# Altium PCB 243-4xx-Suiveur-IR-7.PcbDoc
Units mm, origin at the board's own origin, x right, y up, seen from the top; angles counter-clockwise.
Board outline 88.27 x 31.11 mm, 2 copper layers (Top Layer, Bottom Layer), stack 1.569 mm thick; 61 components, 35 nets, 173 pads, 168 vias.
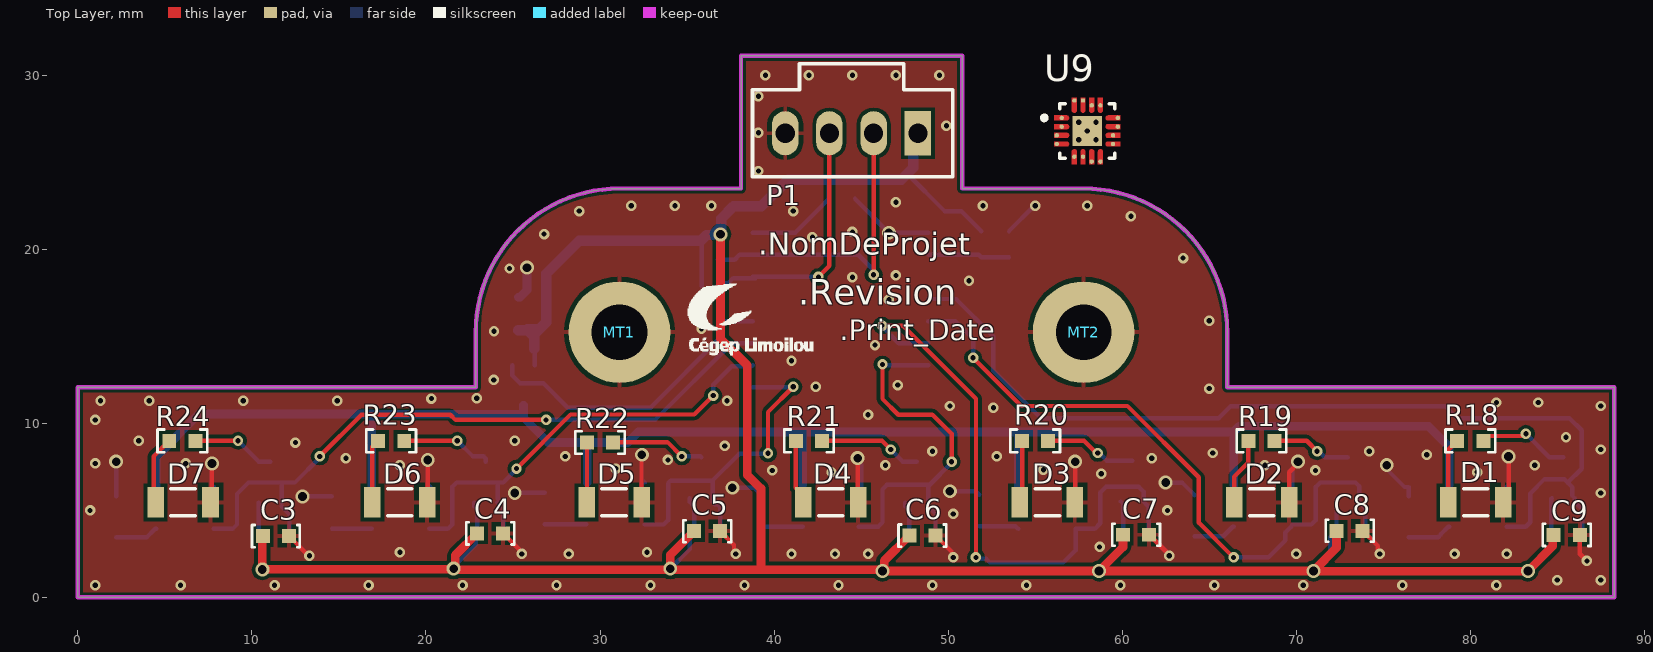
[diagram p0: Top Layer view]
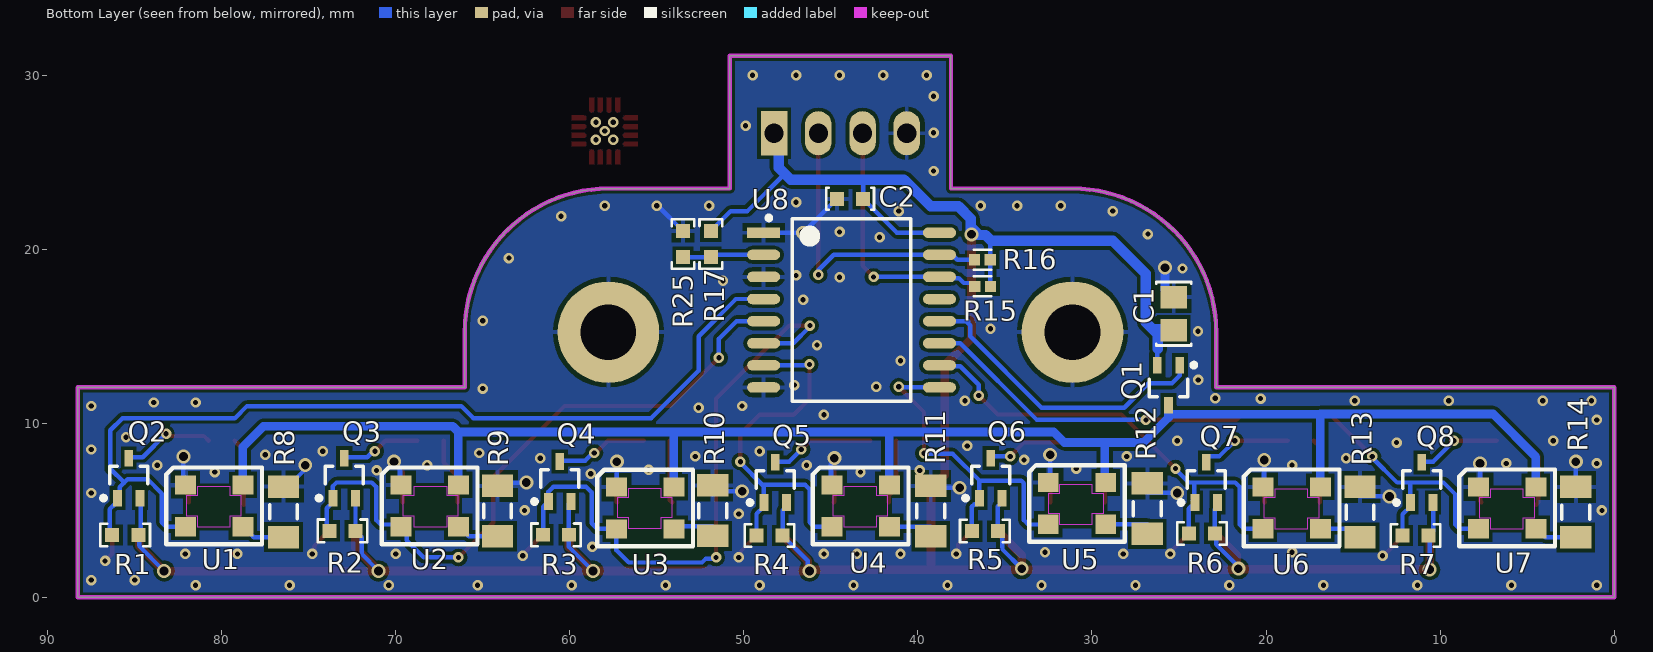
[diagram p1: Bottom Layer view, seen from below]
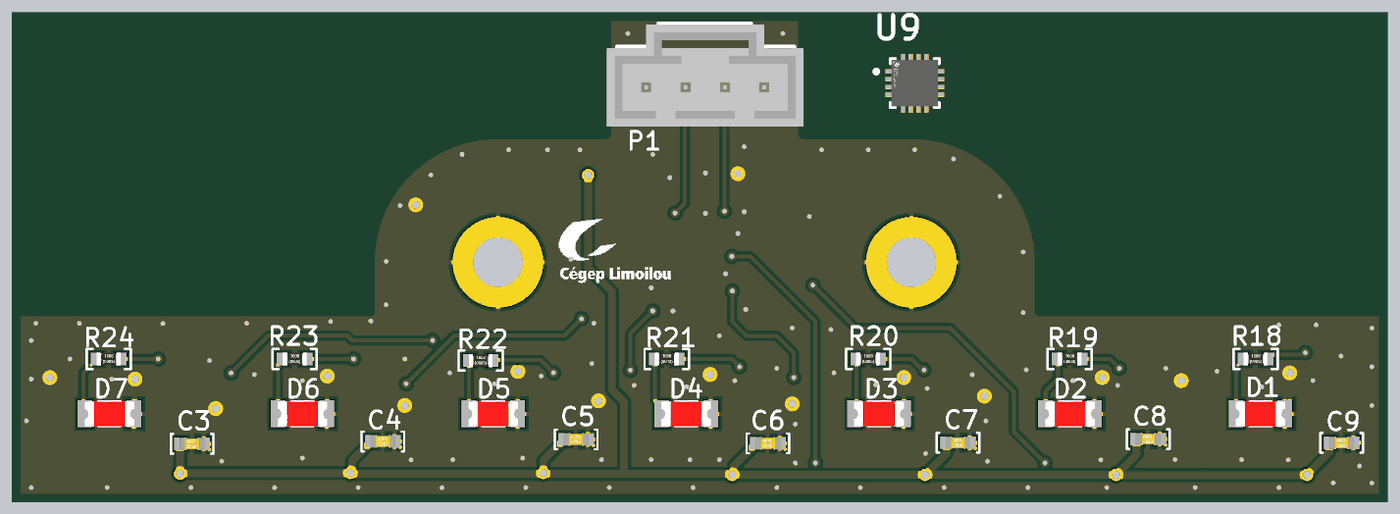
[diagram p2: 3D render of the assembled board from above, using the file's embedded part models]
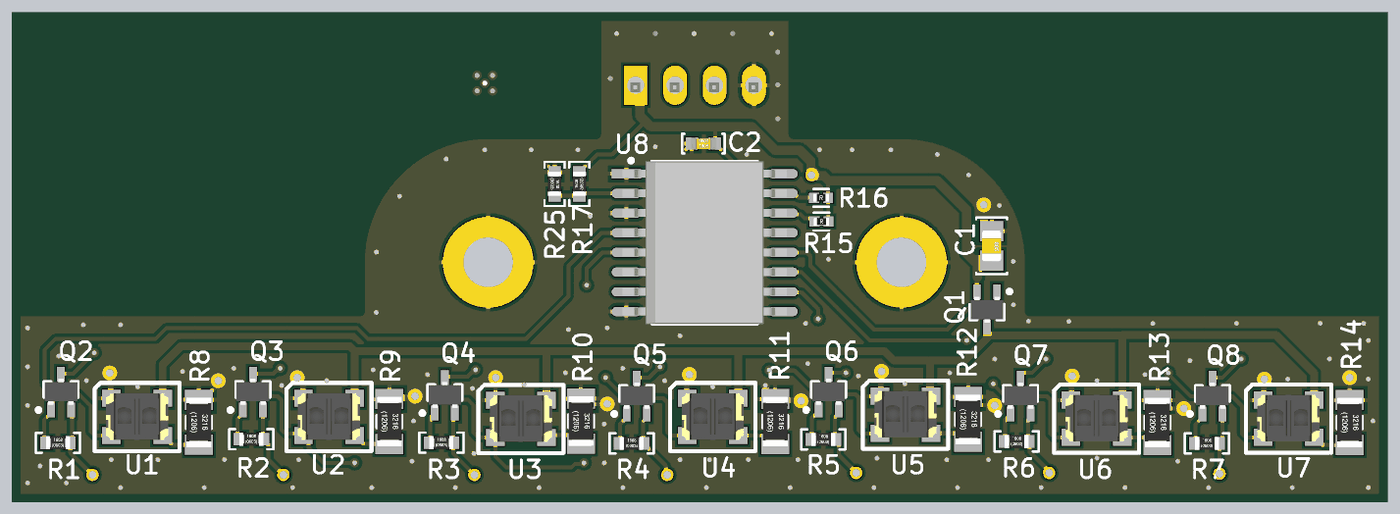
[diagram p3: 3D render of the assembled board from below, using the file's embedded part models]

## Layer stack, top to bottom
Top Solder: solder mask 0.0254, SM-001, Dk 4
Top Layer: signal copper 0.035
Dielectric 1: core 1.4986, Core-043, Dk 4.3
Bottom Layer: signal copper 0.035
Bottom Solder: solder mask 0.0254, SM-001, Dk 4

## Board outline
0,0 0,12.065 22.86,12.065 22.86,15.24 cw(c31.115,15.24) 31.115,23.495 38.1,23.495 38.1,31.115 50.8,31.115 50.8,23.495 57.785,23.495 cw(c57.785,15.24) 66.04,15.24 66.04,12.065 88.265,12.065 88.265,0

## Design rules (kind name [scope] priority, off if disabled: settings)
BoardOutlineClearance [All] p1: gap=0.3 ignorepadtopadclearanceinfootprint=FALSE
Clearance [All] p1: gap=0.2 ignorepadtopadclearanceinfootprint=FALSE
HoleSize [All] p1: absolutevalues=TRUE maxlimit=5 minlimit=0.3 maxpercent=80.000 minpercent=20.000
MinimumSolderMaskSliver [All] p1: minsoldermaskwidth=0.075
PolygonConnect [All] p1: thpad.connectstyle=Relief thpad.reliefconductorwidth=0.254 thpad.reliefentries=4 thpad.polygonreliefangle="90 Angle" thpad.airgapwidth=0.254 smdpad.connectstyle=Relief smdpad.reliefconductorwidth=0.254 smdpad.reliefentries=4 smdpad.polygonreliefangle="90 Angle" smdpad.airgapwidth=0.254 via.connectstyle=Direct via.reliefconductorwidth=0.254 via.reliefentries=4 via.polygonreliefangle="90 Angle" via.airgapwidth=0.254
RoutingVias [All] p1: holewidth=0.5 width=0.8 viastyle="Through Hole" minholewidth=0.3 minwidth=0.6 maxholewidth=0.711 maxwidth=1.27
SilkToSilkClearance [All] p1: silktosilkclearance=0
SilkToSolderMaskClearance [IsPad] p1: minsilkscreentomaskgap=0 clearancetoexposedcopper=TRUE
SolderMaskExpansion [All] p1: expansion=0.075 istentingtop=FALSE
SupplyNets "Schematic Supply Nets_1" [InNet('VCC')] p1: voltage=0.000
SupplyNets "Schematic Supply Nets" [InNet('GND')] p2: voltage=0.000
UnConnectedPin [All] p1:
Width [All] p1: maxlimit=5 minlimit=0.15 preferedwidth=0.2
26 further rules are at their usual default settings.

## Classes and differential pairs
component class SuiveurLigne7: MT1 MT2 P1 U9
component class "IO Expander": C2 R15 R16 R17 R25 U8
component class "Capteur IR": C1 Q1 R1 R2 R3 R4 R5 R6 R7 R8 R9 R10 R11 R12 R13 R14 U1 U2 U3 U4 U5 U6 U7
component class "Indicateurs DEL": C3 C4 C5 C6 C7 C8 C9 D1 D2 D3 D4 D5 D6 D7 Q2 Q3 Q4 Q5 Q6 Q7 Q8 R18 R19 R20 R21 R22 R23 R24

## Components (designator, comment, footprint, x,y, rotation, side; value= is the part's Value field where it differs from the comment)
C1 "CAP CER 4.7uF 25V X7R 0805" C_2012[0805] 25.3,16.3 r270 bottom value=4.7uF
C2 "CAP CER 100nF 50V 0603" C_1608[0603] 43.9,22.9 r180 bottom value=100nF
C3 "CAP CER 100nF 50V 0603" C_1608[0603] 11.38,3.526 r180 top value=100nF
C4 "CAP CER 100nF 50V 0603" C_1608[0603] 23.686,3.678 r180 top value=100nF
C5 "CAP CER 100nF 50V 0603" C_1608[0603] 36.155,3.81 r180 top value=100nF
C6 "CAP CER 100nF 50V 0603" C_1608[0603] 48.527,3.556 r180 top value=100nF
C7 "CAP CER 100nF 50V 0603" C_1608[0603] 60.8,3.6 r180 top value=100nF
C8 "CAP CER 100nF 50V 0603" C_1608[0603] 73.069,3.829 r180 top value=100nF
C9 "CAP CER 100nF 50V 0603" C_1608[0603] 85.544,3.59 r180 top value=100nF
D1 "XL-3216SURC-FB" "LED 1206" 80.315,5.461 r180 top
D2 "XL-3216SURC-FB" "LED 1206" 68.021,5.461 r180 top
D3 "XL-3216SURC-FB" "LED 1206" 55.702,5.461 r180 top
D4 "XL-3216SURC-FB" "LED 1206" 43.256,5.461 r180 top
D5 "XL-3216SURC-FB" "LED 1206" 30.81,5.461 r180 top
D6 "XL-3216SURC-FB" "LED 1206" 18.491,5.461 r180 top
D7 "XL-3216SURC-FB" "LED 1206" 6.045,5.461 r180 top
MT1 "" MTHOLE 31.115,15.24 r0 top locked
MT2 "" MTHOLE 57.785,15.24 r0 top locked
P1 "0705430108" MOLEX4 44.45,26.67 r180 top
Q1 "HXY2101EI" SOT-323 25.6,12.2 r270 bottom
Q2 "HXY2101EI" SOT-323 85.344,6.858 r90 bottom
Q3 "HXY2101EI" SOT-323 72.962,6.858 r90 bottom
Q4 "HXY2101EI" SOT-323 60.58,6.661 r90 bottom
Q5 "HXY2101EI" SOT-323 48.199,6.604 r90 bottom
Q6 "HXY2101EI" SOT-323 35.817,6.858 r90 bottom
Q7 "HXY2101EI" SOT-323 23.435,6.604 r90 bottom
Q8 "HXY2101EI" SOT-323 11.053,6.604 r90 bottom
R1 "Res 30k 1% 0603" R_1608[0603] 85.544,3.59 r180 bottom value=30k
R2 "Res 30k 1% 0603" R_1608[0603] 73.069,3.829 r180 bottom value=30k
R3 "Res 30k 1% 0603" R_1608[0603] 60.8,3.6 r180 bottom value=30k
R4 "Res 30k 1% 0603" R_1608[0603] 48.527,3.556 r180 bottom value=30k
R5 "Res 30k 1% 0603" R_1608[0603] 36.155,3.81 r180 bottom value=30k
R6 "Res 30k 1% 0603" R_1608[0603] 23.686,3.678 r180 bottom value=30k
R7 "Res 30k 1% 0603" R_1608[0603] 11.41,3.556 r180 bottom value=30k
R8 "Res 150R 5% 1206" R_3216[1206] 76.454,4.914 r270 bottom value=150R
R9 "Res 150R 5% 1206" R_3216[1206] 64.157,4.964 r270 bottom value=150R
R10 "Res 150R 5% 1206" R_3216[1206] 51.797,4.987 r270 bottom value=150R
R11 "Res 150R 5% 1206" R_3216[1206] 39.265,4.964 r270 bottom value=150R
R12 "Res 150R 5% 1206" R_3216[1206] 26.819,5.104 r270 bottom value=150R
R13 "Res 150R 5% 1206" R_3216[1206] 14.6,4.9 r270 bottom value=150R
R14 "Res 150R 5% 1206" R_3216[1206] 2.2,4.9 r270 bottom value=150R
R15 "Res 2k2 1% 0402" R_1005[0402] 36.28,17.87 r180 bottom value=2k2
R16 "Res 2k2 1% 0402" R_1005[0402] 36.3,19.4 r180 bottom value=2k2
R17 "Res 1k 1% 0603" R_1608[0603] 51.9,20.3 r90 bottom value=1k
R18 "Res 1k 1% 0603" R_1608[0603] 80,9 r0 top value=1k
R19 "Res 1k 1% 0603" R_1608[0603] 68,9 r0 top value=1k
R20 "Res 1k 1% 0603" R_1608[0603] 55,9 r0 top value=1k
R21 "Res 1k 1% 0603" R_1608[0603] 42,9 r0 top value=1k
R22 "Res 1k 1% 0603" R_1608[0603] 30,8.9 r0 top value=1k
R23 "Res 1k 1% 0603" R_1608[0603] 18,9 r0 top value=1k
R24 "Res 1k 1% 0603" R_1608[0603] 6,9 r0 top value=1k
R25 "Res 1k 1% 0603" R_1608[0603] 53.5,20.3 r270 bottom value=DNP
U1 "ITR1502SR40A/TR8" GP2S700HCP 80.438,5.264 r180 bottom
U2 "ITR1502SR40A/TR8" GP2S700HCP 68.056,5.264 r180 bottom
U3 "ITR1502SR40A/TR8" GP2S700HCP 55.673,5.137 r180 bottom
U4 "ITR1502SR40A/TR8" GP2S700HCP 43.293,5.264 r180 bottom
U5 "ITR1502SR40A/TR8" GP2S700HCP 30.86,5.404 r180 bottom
U6 "ITR1502SR40A/TR8" GP2S700HCP 18.529,5.15 r180 bottom
U7 "ITR1502SR40A/TR8" GP2S700HCP 6.147,5.15 r180 bottom
U8 "PCF8574T/TR" SOIC127P1030X265-16N 43.815,16.51 r180 bottom locked
U9 "TLA2528IRTER" FP-TLA2528IRTER-MFG 58,26.8 r0 top

## Footprints (in the part's own frame and the unit in brackets; to place one, negate y for a bottom-side part, rotate by r counter-clockwise, add the part's x,y. Pads: shape width x height; smd on the part's side, far side on the other; paste and mask are expansions set on the pad)
C_1608[0603] [mm] "Capacitor MLCC; Body 1.6 x 0.8 mm (LxW typ)"
  rect 0.8x0.8 smd: 1(-0.75,0) 2(0.75,0)
  silkscreen extent -1.37,-0.64 1.38,0.64, body extent -0.8,-0.4 0.8,0.4, height 0.8
C_2012[0805] [mm] "Capacitor MLCC; Body 2.0 x 1.3 mm (LxW typ)"
  rect 1.3x1.5 smd: 1(-0.95,0) 2(0.95,0)
  silkscreen extent -1.83,-1 1.83,1, body extent -1,-0.62 1,0.63, height 0.78
FP-TLA2528IRTER-MFG [mm]
  round 0.252 smd paste-1000 mask+0: 1(-1.475,0.75) 2(-1.475,0.25) 3(-1.76,-0.25) 4(-1.76,-0.75) 5(-0.75,-1.475) 6(-0.25,-1.475) 7(0.25,-1.76) 8(0.75,-1.76) 9(1.475,-0.75) 10(1.475,-0.25) 11(1.75,0.25) 12(1.75,0.75) 13(0.75,1.475) 14(0.25,1.475) 15(-0.25,1.75) 16(-0.75,1.75)
  rect 1.7x1.7 smd paste-1000 mask+0: 17(0,0)
  Top Layer region: -0.61,1.9 -0.61,1.19 -0.621,1.136 -0.651,1.091 -0.696,1.061 -0.75,1.05 -0.75,1.05 -0.804,1.061 -0.849,1.091 -0.879,1.136 -0.89,1.19 -0.89,1.19 -0.89,1.9
  Top Layer region: -0.11,1.9 -0.11,1.19 -0.121,1.136 -0.151,1.091 -0.196,1.061 -0.25,1.05 -0.25,1.05 -0.304,1.061 -0.349,1.091 -0.379,1.136 -0.39,1.19 -0.39,1.19 -0.39,1.9
  Top Layer region: 0.39,1.9 0.39,1.19 0.379,1.136 0.349,1.091 0.304,1.061 0.25,1.05 0.25,1.05 0.196,1.061 0.151,1.091 0.121,1.136 0.11,1.19 0.11,1.19 0.11,1.9
  Top Layer region: 0.89,1.9 0.89,1.19 0.879,1.136 0.849,1.091 0.804,1.061 0.75,1.05 0.75,1.05 0.696,1.061 0.651,1.091 0.621,1.136 0.61,1.19 0.61,1.19 0.61,1.9
  Top Layer region: 0.61,-1.9 0.61,-1.19 0.621,-1.136 0.651,-1.091 0.696,-1.061 0.75,-1.05 0.75,-1.05 0.804,-1.061 0.849,-1.091 0.879,-1.136 0.89,-1.19 0.89,-1.19 0.89,-1.9
  Top Layer region: 0.11,-1.9 0.11,-1.19 0.121,-1.136 0.151,-1.091 0.196,-1.061 0.25,-1.05 0.25,-1.05 0.304,-1.061 0.349,-1.091 0.379,-1.136 0.39,-1.19 0.39,-1.19 0.39,-1.9
  Top Layer region: -0.39,-1.9 -0.39,-1.19 -0.379,-1.136 -0.349,-1.091 -0.304,-1.061 -0.25,-1.05 -0.25,-1.05 -0.196,-1.061 -0.151,-1.091 -0.121,-1.136 -0.11,-1.19 -0.11,-1.19 -0.11,-1.9
  Top Layer region: -0.89,-1.9 -0.89,-1.19 -0.879,-1.136 -0.849,-1.091 -0.804,-1.061 -0.75,-1.05 -0.75,-1.05 -0.696,-1.061 -0.651,-1.091 -0.621,-1.136 -0.61,-1.19 -0.61,-1.19 -0.61,-1.9
  Top Layer region: 1.9,0.61 1.19,0.61 1.136,0.621 1.091,0.651 1.061,0.696 1.05,0.75 1.05,0.75 1.061,0.804 1.091,0.849 1.136,0.879 1.19,0.89 1.19,0.89 1.9,0.89
  Top Layer region: 1.9,0.11 1.19,0.11 1.136,0.121 1.091,0.151 1.061,0.196 1.05,0.25 1.05,0.25 1.061,0.304 1.091,0.349 1.136,0.379 1.19,0.39 1.19,0.39 1.9,0.39
  Top Layer region: 1.9,-0.39 1.19,-0.39 1.136,-0.379 1.091,-0.349 1.061,-0.304 1.05,-0.25 1.05,-0.25 1.061,-0.196 1.091,-0.151 1.136,-0.121 1.19,-0.11 1.19,-0.11 1.9,-0.11
  Top Layer region: 1.9,-0.89 1.19,-0.89 1.136,-0.879 1.091,-0.849 1.061,-0.804 1.05,-0.75 1.05,-0.75 1.061,-0.696 1.091,-0.651 1.136,-0.621 1.19,-0.61 1.19,-0.61 1.9,-0.61
  Top Layer region: -1.9,-0.61 -1.19,-0.61 -1.136,-0.621 -1.091,-0.651 -1.061,-0.696 -1.05,-0.75 -1.05,-0.75 -1.061,-0.804 -1.091,-0.849 -1.136,-0.879 -1.19,-0.89 -1.19,-0.89 -1.9,-0.89
  Top Layer region: -1.9,-0.11 -1.19,-0.11 -1.136,-0.121 -1.091,-0.151 -1.061,-0.196 -1.05,-0.25 -1.05,-0.25 -1.061,-0.304 -1.091,-0.349 -1.136,-0.379 -1.19,-0.39 -1.19,-0.39 -1.9,-0.39
  Top Layer region: -1.9,0.39 -1.19,0.39 -1.136,0.379 -1.091,0.349 -1.061,0.304 -1.05,0.25 -1.05,0.25 -1.061,0.196 -1.091,0.151 -1.136,0.121 -1.19,0.11 -1.19,0.11 -1.9,0.11
  Top Layer region: -1.9,0.89 -1.19,0.89 -1.136,0.879 -1.091,0.849 -1.061,0.804 -1.05,0.75 -1.05,0.75 -1.061,0.696 -1.091,0.651 -1.136,0.621 -1.19,0.61 -1.19,0.61 -1.9,0.61
  silkscreen extent -2.6,-1.58 1.58,1.58, body extent -2,-2 2,2, height 0.25
GP2S700HCP [mm]
  rect 1.2x1.1 smd: 1(-1.65,1.2) 2(-1.65,-1.2) 3(1.65,-1.2) 4(1.65,1.2)
  silkscreen extent -2.75,-2.2 2.75,2.2, body extent -2,-1.47 2,1.53, height 2
"LED 1206" [mm]
  rect 0.95x1.75 smd: 1(-1.575,0) 2(1.575,0)
  silkscreen extent -0.7,-0.78 0.7,0.78, body extent -1.6,-0.8 1.6,0.8, height 1.1
MOLEX4 [mm]
  rect 1.524x2.54 hole 1.1: 1(-3.81,0)
  oval 1.524x2.54 hole 1.1: 2(-1.27,0) 3(1.27,0) 4(3.81,0)
  silkscreen extent -5.81,-4 5.69,2.5, body extent -6.38,-3.93 6.32,2.68, height 11.81
MTHOLE [mil]
  round 230 / inner round 60 / far side round 230 hole 125.98: 1(0,0)
R_1005[0402] [mm] "Chip Resistor; Body 1.1 x 0.5 mm (LxW typ)"
  rect 0.65x0.65 smd mask+0.075: 1(-0.45,0) 2(0.45,0)
  silkscreen extent -0.5,-0.57 0.5,0.57, body extent -0.5,-0.25 0.5,0.26, height 0.36
R_1608[0603] [mm] "Chip Resistor; Body 1.6 x 0.8 mm (LxW typ)"
  rect 0.8x0.8 smd: 1(-0.75,0) 2(0.75,0)
  silkscreen extent -1.43,-0.65 1.43,0.65, body extent -0.77,-0.42 0.78,0.43, height 0.45
R_3216[1206] [mm] "Chip Resistor, Body 3.2x1.6mm, IPC Medium Density"
  rect 1.3x1.8 smd: 1(-1.45,0) 2(1.45,0)
  silkscreen extent -0.4,-0.8 0.4,0.8, body extent -1.6,-0.8 1.6,0.8, height 0.55
SOIC127P1030X265-16N [mm] "SOIC, 16-Leads, Body 10,30x7,50mm, Pitch 1,27mm, IPC Medium Density"
  rect 1.9x0.6 smd: 1(-5.05,4.445)
  oval 1.9x0.6 smd: 2(-5.05,3.175) 3(-5.05,1.905) 4(-5.05,0.635) 5(-5.05,-0.635) 6(-5.05,-1.905) 7(-5.05,-3.175) 8(-5.05,-4.445) 9(5.05,-4.445) 10(5.05,-3.175) 11(5.05,-1.905) 12(5.05,-0.635) 13(5.05,0.635) 14(5.05,1.905) 15(5.05,3.175) 16(5.05,4.445)
  silkscreen extent -4.88,-5.25 3.4,5.42, body extent -5.32,-5.25 5.32,5.25, height 2.62
SOT-323 [mm] "SOT23, 3-Leads, Body 2,00x2,28mm, Pitch 0,65mm, IPC Medium Density"
  rect 0.95x0.5 smd: 1(-1.15,0.65) 2(-1.15,-0.65) 3(1.15,0)
  silkscreen extent -1.27,-1.1 0.67,1.57, body extent -1.02,-1.05 1.08,1.05, height 0.9

## Part data
C1: library part CAP003, "Capacitor type 1", Dielectric=X7R, Manufacturer 1="Taiyo Yuden", Manufacturer Part Number 1=TMK212AB7475KG-T, Rated Voltage=25V, Supplier Part Number 1=C163186, Tolerance=10%, Code CEGEP=KCOND02SM, LibRef=CAP003, Mounting Technology=SMT, Supplier 1=LCSC
C2 C3 C4 C5 C6 C7 C8 C9: library part CAP002, "Capacitor type 1", Dielectric=X7R, Manufacturer 1=Yageo, Manufacturer Part Number 1=CC0603KRX7R9BB104, Rated Voltage=50V, Supplier Part Number 1=C14663, Tolerance=10%, Code CEGEP=COND0143SM, LibRef=CAP002, Mounting Technology=SMT, Supplier 1=LCSC
D1 D2 D3 D4 D5 D6 D7: library part D_LED_RED_1206, "DEL Rouge 1206", Manufacturer 1=XINGLIGHT, Manufacturer 2="Würth Elektronik", Manufacturer Part Number 2=150120RS75000, Supplier Part Number 1=C3646938, Code CEGEP=LEDROUGECLAIR, Localisation=AVP-14, Manufacturer Part Number 1=XL-3216SURC-FB, Mounting Technology=SMT, Supplier 1=LCSC, Supplier 2=Digikey, Supplier Part Number 2=732-4991-1-ND
MT1 MT2: library part ANTENNA
P1: library part CONN-100MIL-HDR-01X04-WIRE-TO-BORAD, "CONN HEADER VERT 4POS 2.54MM", Manufacturer 1=CJT, Manufacturer 2=Molex, Manufacturer Part Number 1=A2547WV-4P, Supplier Part Number 1=C5224497, Code CEGEP=CONDIV089, Localisation=AV-Q06--R14-J057, Manufacturer Part Number 2=0705430108, Mounting Technology=TH, Supplier 1=LCSC, Supplier 2=Digikey, Supplier Part Number 2=WM4124-ND
Q1 Q2 Q3 Q4 Q5 Q6 Q7 Q8: library part Q_PMOS-20V-1.8A, "MOSFET P-CH 20V 1.8A SOT-323", Manufacturer 1="HXY Mosfet", Manufacturer 2=MCC, Manufacturer Part Number 2=SI2101A-TP, Supplier Part Number 1=C5148643, Manufacturer Part Number 1=HXY2101EI, Mounting Technology=SMT, Supplier 1=LCSC, Supplier 2=Digikey, Supplier Part Number 2=353-SI2101A-TPCT-ND
R1 R2 R3 R4 R5 R6 R7: library part RES030, "Resistor type 1", Manufacturer 1=Yageo, Manufacturer Part Number 1=RC0603FR-0730KL, Max Working Voltage=75V, Supplier Part Number 1=C100001, Tolerance=1%, LibRef=RES030, Mounting Technology=SMT, Puissance=1/10W, Supplier 1=LCSC
R8 R9 R10 R11 R12 R13 R14: library part RES042, "Resistor type 1", Max Working Voltage=200V, Tolerance=5%, Code CEGEP=RESI0045SMT, LibRef=RES042, Localisation=AV-P24--R14-J04, Mounting Technology=SMT, Puissance=1/4W
R15 R16: library part RES008, "Resistor type 1", Manufacturer 1=Yageo, Manufacturer Part Number 1=RC0402FR-072K2L, Max Working Voltage=50V, Supplier Part Number 1=C114762, Tolerance=1%, Code CEGEP=RES2.2KSM, LibRef=RES008, Mounting Technology=SMT, Puissance=1/16W, Supplier 1=LCSC, Supplier 2=Digi-Key, Supplier Part Number 2=311-2.20KLRCT-ND
R17 R18 R19 R20 R21 R22 R23 R24 R25: library part RES015, "Resistor type 1", Manufacturer 1=Yageo, Manufacturer Part Number 1=RC0603FR-071KL, Max Working Voltage=75V, Supplier Part Number 1=C22548, Tolerance=1%, LibRef=RES015, Mounting Technology=SMT, Puissance=1/10W, Supplier 1=LCSC
U1 U2 U3 U4 U5 U6 U7: library part U_ITR1502SR40A/TR8, "PHOTOINTERRUPTER REFLECTIVE 3MM SMD", Manufacturer 1=Everlight, Manufacturer 2=Sharp, Manufacturer Part Number 2=GP2S700HCP, Supplier Part Number 1=C183793, Manufacturer Part Number 1=ITR1502SR40A/TR8, Mounting Technology=SMT, Supplier 1=LCSC, Supplier 2=Digikey, Supplier Part Number 2=1855-1020-1-ND
U8: library part U_PCF8574-SOIC, "Remote 8-bit I/O expander for I2C-bus", Manufacturer 1="HG Semi", Manufacturer 2=TI, Manufacturer Part Number 2=PCF8574DWR, Supplier Part Number 1=C2987288, Code CEGEP=KIC8574SM, Localisation=R13-D030, Manufacturer Part Number 1=PCF8574T/TR, Mounting Technology=SMT, Supplier 1=LCSC, Supplier 2=Digikey, Supplier Part Number 2=296-13108-1-ND
U9: library part CMP-04860-000031-1, "SMALL 8-CHANNEL 12-BIT ANALOG-TO", RoHS Compliant=Yes

## Via types
v1: diameter 0.6, hole 0.3, Top Layer to Bottom Layer, tented both sides, 139 vias
v2: diameter 0.8, hole 0.5, Top Layer to Bottom Layer, 24 vias
v3: diameter 0.6, hole 0.3, Top Layer to Bottom Layer, 5 vias

## Nets (pads, with @x,y where several pads share a name; then routed paths per layer and width w, separated by ;. In a path a pad name is that pad's centre, name@x,y a point inside that pad or via, vN(x,y) a via of type N, cw(c..) or ccw(c..) an arc to the next point about the centre after c; other vN are vias at no path point)
GND: C1.1 C2.1 C3.1 C4.1 C5.1 C6.1 C7.1 C8.1 C9.1 D1.1 D2.1 D3.1 D4.1 D5.1 D6.1 D7.1 MT1.1 MT2.1 P1.4 R8.1 R9.1 R10.1 R11.1 R12.1 R13.1 R14.1 R25.1 U1.1 U2.1 U3.1 U4.1 U5.1 U6.1 U7.1 U8.1 U8.3 U8.8 | length 63.1
  Top Layer w0.254: D7.1 7.7,5.541 v2(7.7,7.7) ; C3.1 13.256,2.4 v1(13.3,2.4) ; D6.1 20.1,5.495 v2(20.1,7.9) ; C4.1 25.434,2.68 25.434,2.566 v1(25.5,2.5) ; D5.1 32.385,8.185 v2(32.4,8.2) ; C5.1 37.696,3.019 37.696,2.604 v1(37.8,2.5) ; v2(44.8,8) 44.8,5.492 D4.1 ; C6.1 50.196,2.637 50.196,2.404 v1(50.3,2.3) ; D3.1 57.3,5.484 v2(57.3,7.8) ; C7.1 62.7,2.45 v1(62.7,2.4) ; D2.1 69.596,7.2 70.1,7.703 v2(70.1,7.8) ; C8.1 74.696,2.952 74.696,2.604 v1(74.8,2.5) ; D1.1 81.89,5.861 82.2,6.171 v2(82.2,8.1) ; C9.1 86.294,2.506 v1(86.7,2.1)
  Bottom Layer w0.254: R14.1@2.194,5.806 2.2,5.813 v2(2.2,7.8) ; v2(7.7,7.7) 7.7,6.447 U7.1 ; v2(12.9,5.8) 12.906,5.806 R13.1@14.594,5.806 ; v2(20.1,7.9) 20.1,6.493 U6.1@20.243,6.35 ; v2(25.1,6) 25.11,6.01 R12.1@26.812,6.01 ; v2(32.4,8.2) 32.4,6.766 U5.1@32.562,6.604 ; v2(37.6,6.3) 38.849,6.3 39.258,5.891 R11.1@39.258,5.87 ; C2.1 v2(46.595,20.955) U8.1 ; v2(44.8,8) 44.8,7.852 45.008,7.644 U4.1@45.008,6.35 ; v2(50.1,6.1) 51.584,6.1 R10.1@51.791,5.893 ; R25.1 54.95,22.5 v1(55,22.5) ; U3.1@57.3,6.377 v2(57.3,7.8) ; v2(62.5,6.6) 63.441,6.6 64.15,5.891 R9.1@64.15,5.87 ; U2.1@69.773,6.337 69.773,7.395 70.1,7.722 v2(70.1,7.8) ; v2(75.2,7.6) 75.304,7.496 75.304,7.264 76.222,6.346 76.454,6.346 R8.1@76.454,5.814 ; U1.1@82.092,6.35 82.2,6.458 v2(82.2,8.1)
  Bottom Layer w0.5: C1.1 25.4,17.25 25.8,17.65 25.8,18.941 v2(25.807,18.948)
  other v1: 1,0.7 5.9,0.7 11.3,0.7 16.7,0.7 22.1,0.7 27.5,0.7 32.9,0.7 38.3,0.7 43.7,0.7 49.1,0.7 54.5,0.7 59.9,0.7 65.3,0.7 70.4,0.7 76.1,0.7 81.5,0.7 85,1 87.5,1 28.2,2.5 41,2.5 43.5,2.5 45.4,2.5 70,2.5 79.1,2.5 82.1,2.5 18.5,2.6 32.7,2.6 58.7,2.9 50.3,4.8 0.7,5 62.6,5 87.5,6 58.8,7.1 43.3,7.2 80.4,7.2 39.9,7.3 71.1,7.3 55.473,7.337 30.9,7.4 18.5,7.6 46.4,7.6 68.2,7.6 83.7,7.6 1,7.7 6.2,7.7 33.9,7.9 15.4,8 61.7,8 28,8.1 52.8,8.1 77.5,8.2 65.2,8.3 49.1,8.4 74.2,8.4 87.5,8.5 37.167,8.708 12.5,8.9 3.5,9 25.1,9 85.5,9.2 1,10.2 45.4,10.5 52.6,10.9 50.1,11 87.5,11 81.5,11.2 83.9,11.2 1.3,11.3 4.1,11.3 9.5,11.3 14.9,11.3 37.3,11.3 20.312,11.425 22.921,11.445 65,12 42.4,12.1 47.1,12.2 23.9,12.5 41,13.6 45.8,14.5 23.907,15.299 35.829,15.439 65,15.9 46.6,17.1 51.2,18.2 44.5,18.4 47,18.5 24.8,18.9 63.5,19.5 42.2,20.7 26.784,20.875 44.5,21 60.5,21.9 28.8,22.2 41.1,22.2 31.8,22.5 34.3,22.5 36.4,22.5 52,22.5 58,22.5 47,22.7 39.1,24.5 39.1,26.7 49.9,27.1 39.1,28.8 39.5,30 42,30 44.5,30 47,30 49.5,30
NetD1_2: D1.2 R18.1 | length 3.9
  Top Layer w0.254: D1.2@78.74,5.334 D1.2 78.74,8.49 R18.1
NetD2_2: D2.2 R19.1 | length 3.9
  Top Layer w0.254: D2.2 66.446,6.946 67.25,7.75 R19.1
NetD3_2: D3.2 R20.1 | length 3.6
  Top Layer w0.254: D3.2 54.25,5.584 R20.1
NetD4_2: D4.2 R21.1 | length 3.7
  Top Layer w0.254: R21.1 41.25,6.292 41.681,5.861 D4.2
NetD5_2: D5.2 R22.1 | length 3.4
  Top Layer w0.254: D5.2@29.25,5.476 R22.1
NetD6_2: D6.2 R23.1 | length 3.7
  Top Layer w0.254: D6.2 16.916,8.666 R23.1
NetD7_2: D7.2 R24.1 | length 4.1
  Top Layer w0.254: D7.2@4.47,5.334 4.35,5.454 4.35,8.1 R24.1
NetQ1_1: Q1.1 U8.12 | length 17.7
  Bottom Layer w0.254: Q1.1 24.95,12.75 25.4,12.3 26.748,12.3 28.148,10.9 32.9,10.9 37,15 37,15.634 37.241,15.875 ; 37.113,15.875 37.241,15.875 ; U8.12 37.241,15.875
NetQ1_3: Q1.3 U1.4 U2.4 U3.4 U4.4 U5.4 U6.4 U7.4 | length 97.2
  Bottom Layer w0.5: U7.4 4.497,8.089 6.949,10.541 16.891,10.541 16.879,10.529 ; U6.4 16.879,10.529 ; Q1.3 25.6,10.541 25.6,10.341 ; U5.4@29.261,6.604 29.261,8.9 ; U4.4@41.642,6.477 41.642,9.5 ; U3.4@54.024,6.35 54.024,9.5 ; U2.4 66.406,9.5 ; U1.4 78.788,8.638 77.599,9.827 66.719,9.827 66.406,9.514 66.406,9.5 ; 16.879,10.529 25.412,10.529 25.6,10.341 ; 25.6,10.341 27.041,8.9 29.261,8.9 ; 29.261,8.9 31.6,8.9 32.2,9.5 41.642,9.5 ; 41.642,9.5 54.024,9.5 ; 54.024,9.5 66.406,9.5
NetQ2_1: Q2.1 R1.1 U1.2 U8.4 | length 54.8
  Bottom Layer w0.254: U8.4 50.455,17.145 52.6,15 52.6,13.034 55.334,10.3 65.538,10.3 66.233,10.995 78.547,10.995 79.242,10.3 85.7,10.3 86.4,9.6 86.4,7.4 85.6,6.6 ; U1.2 83.185,4.064 83.439,4.318 83.439,5.969 84.27,6.8 85.4,6.8 85.6,6.6 ; R1.1@86.444,3.59 86.444,5.061 86.145,5.36 86.117,5.36 85.994,5.483 Q2.1 85.871,5.831 85.871,6.329 85.6,6.6
NetQ2_3: Q2.3 R18.2 | length 5.3
  Top Layer w0.254: R18.2 81.023,9.273 82.979,9.273 83.106,9.4 v1(83.2,9.4)
  Bottom Layer w0.254: v1(83.2,9.4) 84.542,8.058 Q2.3@85.344,8.058
NetQ3_1: Q3.1 R2.1 U2.2 U8.5 | length 38.4
  Top Layer w0.254: v1(51.434,13.766) 54.2,11 60.3,11 64.4,6.9 64.4,4.3 v1(66.4,2.3)
  Bottom Layer w0.254: U8.5 50.425,15.875 51.434,14.866 v1(51.434,13.766) ; v1(66.4,2.3) 68.4,2.3 69.382,3.282 69.382,3.74 U2.2 ; U2.2@69.769,4.191 70.866,4.191 71.12,4.445 71.12,6.35 71.374,6.604 73.406,6.604 73.612,6.398 73.612,5.483 73.969,5.126 R2.1@73.969,3.829
NetQ3_3: Q3.3 R19.2 | length 4.6
  Top Layer w0.254: R19.2 70.6,9 v1(71.2,8.4)
  Bottom Layer w0.254: v1(71.2,8.4) 71.294,8.4 71.636,8.058 Q3.3@72.962,8.058
NetQ4_1: Q4.1 R3.1 U3.2 U8.6 | length 35.5
  Top Layer w0.254: v1(46.203,15.621) 47.396,15.621 51.6,11.417 v1(51.6,2.3)
  Bottom Layer w0.254: v1(46.203,15.621) 46.203,15.57 47.168,14.605 U8.6 ; v1(51.6,2.3) 51.666,2.234 52.181,2.234 52.408,2.007 56.617,2.007 57.323,2.713 U3.2 58.42,3.937 58.74,4.257 58.74,6.035 59.072,6.367 60.943,6.367 61.23,6.08 Q4.1 61.53,5.211 61.53,3.675 R3.1@61.649,3.556
NetQ4_3: Q4.3 R20.2 | length 5.3
  Top Layer w0.254: R20.2 57.806,9 58.506,8.3 v1(58.6,8.3)
  Bottom Layer w0.254: v1(58.6,8.3) 58.685,8.3 59.124,7.861 Q4.3@60.58,7.861
NetQ5_1: Q5.1 R4.1 U4.2 U8.7 | length 22.2
  Top Layer w0.254: v1(46.228,13.386) 46.228,11.405 47.133,10.5 49.1,10.5 50.2,9.4 v1(50.2,7.8)
  Bottom Layer w0.254: U4.2@44.877,4.064 45.974,4.064 46.228,4.318 46.228,6.223 46.482,6.477 48.849,6.477 48.946,6.477 ; v1(46.228,13.386) 46.279,13.335 U8.7 ; R4.1 49.277,4.801 48.849,5.229 48.849,6.38 48.946,6.477 ; v1(50.2,7.8) 50.2,7.731 48.946,6.477
NetQ5_3: Q5.3 R21.2 | length 5.9
  Top Layer w0.254: R21.2 46.2,9 v1(46.7,8.5)
  Bottom Layer w0.254: v1(46.7,8.5) 47.396,7.804 Q5.3@48.199,7.804
NetQ6_1: Q6.1 R5.1 U5.2 U8.9 | length 20
  Top Layer w0.254: v1(39.649,8.28) 39.649,10.649 v1(41.1,12.1)
  Bottom Layer w0.254: U5.2@32.558,4.191 33.655,4.191 33.909,4.445 33.909,6.564 34.058,6.713 36.467,6.713 ; R5.1 36.905,5.211 36.756,5.36 36.59,5.36 36.467,5.483 Q6.1 36.467,6.713 ; U8.9 38.783,12.083 41.082,12.083 v1(41.1,12.1) ; v1(39.649,8.28) 39.624,8.255 38.009,8.255 36.467,6.713
NetQ6_3: Q6.3 R22.2 | length 5.4
  Top Layer w0.254: R22.2 30.777,8.927 33.873,8.927 v1(34.7,8.1)
  Bottom Layer w0.254: v1(34.7,8.1) 35.775,8.1 Q6.3@35.817,8.058
NetQ7_1: Q7.1 R6.1 U6.2 U8.10 | length 27.1
  Top Layer w0.254: v1(25.2,7.4) 28.31,10.51 35.41,10.51 v1(36.5,11.6)
  Bottom Layer w0.254: U6.2 21.247,3.95 21.26,3.937 21.514,4.191 21.514,6.35 21.768,6.604 24.13,6.604 ; Q7.1 24.436,5.103 R6.1 ; Q7.1@24.21,5.579 24.13,5.659 24.13,6.604 ; v1(25.2,7.4) 25.2,7.369 24.435,6.604 24.13,6.604 ; v1(36.5,11.6) 36.5,12.226 37.565,13.29 38.721,13.29 U8.10
NetQ7_3: Q7.3 R23.2 | length 5.3
  Top Layer w0.254: R23.2 v1(21.8,9)
  Bottom Layer w0.254: v1(21.8,9) 22.698,8.102 23.312,8.102 23.435,7.979 Q7.3@23.435,7.804
NetQ8_1: Q8.1 R7.1 U7.2 U8.11 | length 39.7
  Top Layer w0.254: v1(13.9,8.1) 13.9,8.109 16.294,10.503 21.399,10.503 21.702,10.2 v1(26.9,10.2)
  Bottom Layer w0.254: U7.2@7.793,3.937 8.89,3.937 9.144,4.191 9.144,5.944 9.804,6.604 11.703,6.604 ; Q8.1@11.703,5.229 12.16,4.772 R7.1 ; Q8.1 11.703,6.604 ; v1(13.9,8.1) 13.9,8.033 12.471,6.604 11.703,6.604 ; v1(26.9,10.2) 33.162,10.2 37.567,14.605 U8.11
NetQ8_3: Q8.3 R24.2 | length 4.8
  Top Layer w0.254: R24.2 v1(9.2,9)
  Bottom Layer w0.254: v1(9.2,9) 10.396,7.804 Q8.3@11.053,7.804
NetR8_2: R8.2 U1.3 | length 2.6
  Bottom Layer w0.254: R8.2 78.166,3.464 78.315,3.613 78.315,3.641 78.738,4.064 U1.3
NetR9_2: R9.2 U2.3 | length 2.5
  Bottom Layer w0.254: R9.2 65.806,3.514 66.356,4.064 U2.3
NetR10_2: R10.2 U3.3 | length 2.3
  Bottom Layer w0.254: R10.2@51.797,4.087 53.873,4.087 U3.3
NetR11_2: R11.2 U4.3 | length 7.2
  Bottom Layer w0.254: U4.3@41.649,4.07 U4.3 ; R11.2@39.265,4.064 U4.3 ; R11.2@39.265,4.064 U4.3 ; R11.2@39.265,4.064 U4.3 ; U4.3 U4.3@41.656,4.077 ; U4.3 U4.3@41.656,4.077 ; U4.3 U4.3@41.656,4.077
NetR12_2: R12.2 U5.3 | length 2.4
  Bottom Layer w0.254: R12.2@26.819,4.204 U5.3
NetR13_2: R13.2 U6.3 | length 2.3
  Bottom Layer w0.254: R13.2@14.6,3.95 U6.3 U6.3@16.891,3.95
NetR14_2: R14.2 U7.3 | length 2.5
  Bottom Layer w0.254: R14.2 3.947,3.45 4.447,3.95 U7.3
NetR17_1: R17.1 R25.2 U8.2 | length 4.7
  Bottom Layer w0.254: U8.2 51.765,19.685 R17.1 R25.2
SCL: P1.3 R15.1 U8.14 | length 14.8
  Top Layer w0.254: v1(42.545,18.415) 43.18,19.05 P1.3
  Bottom Layer w0.25: R15.1 36.93,18.07 37.37,18.07 37.648,18.348 38.933,18.348 U8.14@39,18.415
  Bottom Layer w0.254: U8.14 39,18.415 v1(42.545,18.415)
SDA: P1.2 R16.1 U8.15 | length 17.8
  Top Layer w0.254: v1(45.72,18.542) P1.2
  Bottom Layer w0.25: R16.1 37.735,19.4 38.02,19.685 U8.15
  Bottom Layer w0.254: U8.15 44.831,19.685 45.72,18.796 v1(45.72,18.542)
VCC: C1.2 C2.2 C3.2 C4.2 C5.2 C6.2 C7.2 C8.2 C9.2 P1.1 Q1.2 Q2.2 Q3.2 Q4.2 Q5.2 Q6.2 Q7.2 Q8.2 R1.2 R2.2 R3.2 R4.2 R5.2 R6.2 R7.2 R15.2 R16.2 R17.2 U8.16 | length 191.7
  Top Layer w0.5: C3.2 10.6,3.496 v2(10.6,1.6) 10.626,1.626 21.565,1.626 v2(21.59,1.651) ; C4.2 21.69,2.432 21.69,1.751 v2(21.59,1.651) ; v2(34.036,1.651) 34.036,2.441 C5.2 ; v2(36.926,20.863) 36.926,14.874 38.466,13.334 38.466,7.034 39.243,6.257 39.243,1.587 ; v2(46.228,1.524) v2@46.26,1.556 ; C6.2 46.332,2.111 46.332,1.628 v2@46.26,1.556 ; C7.2 60.05,2.9 v2(58.674,1.524) ; v2(70.993,1.524) v2(58.674,1.524) ; v2@71.016,1.501 83.289,1.501 v2(83.312,1.524) 84.746,2.958 84.746,3.542 C9.2 ; v2@71.056,1.587 72.319,2.85 C8.2 ; v2(21.59,1.651) 21.653,1.587 39.243,1.587 ; 39.243,1.587 46.228,1.587 v2@46.26,1.556 ; v2@46.26,1.556 46.291,1.524 v2(58.674,1.524)
  Bottom Layer w0.25: 35.8,20.5 35.85,20.45 R16.2 35.84,19.39 35.84,17.88 R15.2
  Bottom Layer w0.254: Q8.2 10.403,3.813 R7.2 10.6,3.496 v2(10.6,1.6) ; v2@21.463,1.651 22.858,3.046 22.858,3.6 R6.2 22.936,5.078 22.785,5.229 Q7.2 ; Q1.2 26.25,14.25 ; v2(34.036,1.651) 35.167,2.782 R5.2@35.167,3.81 ; Q6.2 35.167,5.483 35.405,5.245 R5.2 ; U8.16 41.205,20.955 C2.2 43.15,23.97 43.18,24 ; v2(46.228,1.524) 46.324,1.62 46.324,2.103 R4.2 47.777,5.001 47.549,5.229 Q5.2 ; 47.649,24.349 49.798,22.2 50.75,22.2 R17.2 ; v2(58.674,1.524) 60.05,2.9 R3.2 60.05,5.391 Q4.2 ; v2(70.993,1.524) 71.959,2.49 71.959,3.469 R2.2@72.244,3.754 ; R2.2@72.169,3.829 72.312,3.972 Q3.2 ; v2(83.312,1.524) 84.746,2.958 84.746,3.542 R1.2 R1.2@84.694,3.69 ; R1.2@84.644,3.59 84.644,5.658 Q2.2
  Bottom Layer w0.6: C1.2 25.85,15.35 26.211,14.989 ; C1.2@25.85,15.4 26.5,15.4 ; 26.211,14.289 26.211,14.989 ; 36.964,21.333 36.964,21.283 ; P1.1 47.998,26.408 47.998,24.698 47.649,24.349 47.3,24 43.18,24 40.8,24 39.268,22.468 37.668,22.468 36.964,21.764 36.964,21.283 ; 26.211,14.989 26.211,15.111 26.5,15.4 ; 26.5,15.4 26.9,15.8 26.9,18.6 28.8,20.5 35.8,20.5 36.125,20.825 36.506,20.825 ; 36.506,20.825 36.887,20.825 v2(36.926,20.863) 36.964,20.902 36.964,21.283 ; 36.506,20.825 36.964,21.283
pads on no net: U8.13 U9.1 U9.2 U9.3 U9.4 U9.5 U9.6 U9.7 U9.8 U9.9 U9.10 U9.11 U9.12 U9.13 U9.14 U9.15 U9.16 U9.17
copper on no net:
  other v3: 57.5,26.3 58.5,26.3 58,26.8 57.5,27.3 58.5,27.3

## Polygon pours and split planes (outlines as drawn)
GND on Top Layer "PLANE-TOP" (solid, remove dead copper, pour order 4): 0,0 0,12.065 22.86,12.065 22.86,15.24 cw(c31.115,15.24) 31.115,23.495 38.1,23.495 38.1,31.115 50.8,31.115 50.8,23.495 57.785,23.495 cw(c57.785,15.24) 66.04,15.24 66.04,12.065 88.265,12.065 88.265,0
GND on Bottom Layer "PLANE-BOT" (solid, remove dead copper, pour order 5): -0.084,-0.084 -0.084,11.981 22.776,11.981 22.776,15.156 cw(c31.031,15.156) 31.031,23.411 38.016,23.411 38.016,31.031 50.716,31.031 50.716,23.411 57.701,23.411 cw(c57.701,15.156) 65.956,15.156 65.956,11.981 88.181,11.981 88.181,-0.084

## Keep-outs
Bottom Layer:
  region: 78.867,5.842 79.502,5.842 79.502,6.35 81.407,6.35 81.407,5.842 82.042,5.842 82.042,4.699 81.407,4.699 81.407,4.064 79.502,4.064 79.502,4.699 78.867,4.699
  region: 66.421,5.842 67.056,5.842 67.056,6.35 68.961,6.35 68.961,5.842 69.596,5.842 69.596,4.699 68.961,4.699 68.961,4.064 67.056,4.064 67.056,4.699 66.421,4.699
  region: 54.102,5.74 54.737,5.74 54.737,6.248 56.642,6.248 56.642,5.74 57.277,5.74 57.277,4.597 56.642,4.597 56.642,3.962 54.737,3.962 54.737,4.597 54.102,4.597
  region: 41.719,5.842 42.355,5.842 42.355,6.35 44.259,6.35 44.259,5.842 44.895,5.842 44.895,4.699 44.259,4.699 44.259,4.064 42.355,4.064 42.355,4.699 41.719,4.699
  region: 29.337,5.969 29.972,5.969 29.972,6.477 31.877,6.477 31.877,5.969 32.512,5.969 32.512,4.826 31.877,4.826 31.877,4.191 29.972,4.191 29.972,4.826 29.337,4.826
  region: 16.954,5.715 17.59,5.715 17.59,6.223 19.494,6.223 19.494,5.715 20.13,5.715 20.13,4.572 19.494,4.572 19.494,3.937 17.59,3.937 17.59,4.572 16.954,4.572
  region: 4.572,5.715 5.207,5.715 5.207,6.223 7.112,6.223 7.112,5.715 7.747,5.715 7.747,4.572 7.112,4.572 7.112,3.937 5.207,3.937 5.207,4.572 4.572,4.572
Keep-Out Layer:
  lines w0.254: 0,0 88.265,0 88.265,12.065 66.04,12.065 66.04,15.24 ccw(c57.785,15.24) 57.785,23.495 50.8,23.495 50.8,31.115 38.1,31.115 38.1,23.495 31.115,23.495 ccw(c31.115,15.24) 22.86,15.24 22.86,12.065 22.225,12.065 0,12.065 0,0

## Silkscreen, mask and mechanical layers (free items; w line width, h text height)
Top Overlay:
  drawing of 18 lines, arcs and shapes, not listed
  text ".NomDeProjet" at 39.1,19.268 h2.2
  text ".Revision" at 41.4,16.325 h2.5
  text ".Print_Date" at 43.763,14.373 h2
Board:
  the board outline again, w0.5
Drill Drawing:
  lines w0.254: 98.503,5.89 99.837,5.89 99.837,7.224 98.503,7.224 98.503,5.89 ; 98.503,10.224 99.837,10.224 99.17,8.89 98.503,10.224 ; 98.503,11.89 99.17,12.224 99.837,11.89 99.503,12.557 99.837,13.224 99.17,12.89 98.503,13.224 98.837,12.557 98.503,11.89 ; 98.503,15.224 98.837,15.224 99.17,14.89 99.503,15.224 99.837,15.224 99.503,15.557 99.837,15.89 99.503,15.89 99.17,16.224 98.837,15.89 98.503,15.89 98.837,15.557 98.503,15.224
  lines w0.381: 97.29,4.99 226.684,4.99 ; 97.29,16.99 226.684,16.99 ; 98.59,33.288 109.002,33.288 142.775,33.288 158.011,33.288 174.517,33.288 188.991,33.288 ; 98.59,36.336 109.002,36.336 142.775,36.336 158.011,36.336 174.517,36.336 188.991,36.336 ; 98.59,39.384 109.002,39.384 142.775,39.384 158.011,39.384 174.517,39.384 188.991,39.384 ; 98.59,42.432 109.002,42.432 142.775,42.432 158.011,42.432 174.517,42.432 188.991,42.432 ; 98.59,45.48 109.002,45.48 142.775,45.48 158.011,45.48 174.517,45.48 188.991,45.48 ; 98.59,48.528 109.002,48.528 142.775,48.528 158.011,48.528 174.517,48.528 188.991,48.528 ; 98.59,51.576 109.002,51.576 142.775,51.576 158.011,51.576 174.517,51.576 188.991,51.576 ; 98.59,54.624 109.002,54.624 142.775,54.624 158.011,54.624 174.517,54.624 188.991,54.624 ; 98.59,57.672 188.991,57.672 ; 108.481,1.99 108.481,19.99 ; 109.002,60.72 109.002,30.24 ; 120.386,1.99 120.386,19.99 ; 142.775,60.72 142.775,30.24 ; 143.487,1.99 143.487,19.99 ; 153.777,1.99 153.777,19.99 ; 158.011,60.72 158.011,30.24 ; 168.626,1.99 168.626,19.99 ; 174.517,60.72 174.517,30.24 ; 198.725,1.99 198.725,19.99 ; 210.695,1.99 210.695,19.99 ; 109.002,30.24 142.775,30.24 ; 109.002,30.24 98.59,30.24 98.59,60.72 188.991,60.72 188.991,30.24 174.517,30.24 ; 142.775,30.24 158.011,30.24 ; 158.011,30.24 174.517,30.24 ; 97.29,1.99 226.684,1.99 226.684,19.99 97.29,19.99 97.29,1.99
  text "Layer" at 100.368,58.434 h1.52
  text "Name" at 110.78,58.434 h1.52
  text "Material" at 144.553,58.434 h1.52
  text "Thickness" at 159.789,58.434 h1.52
  text "Constant" at 176.295,58.434 h1.52
  text "Top Overlay" at 110.78,55.386 h1.52
  text "Top Solder" at 110.78,52.338 h1.52
  text "SM-001" at 144.553,52.338 h1.52
  text "1.00mil" at 159.789,52.338 h1.52
  text "4" at 176.295,52.338 h1.52
  text "Top Surface Finish" at 110.78,49.29 h1.52
  text "PbSn" at 144.553,49.29 h1.52
  text "0.79mil" at 159.789,49.29 h1.52
  text "1" at 100.368,46.242 h1.52
  text "Top Layer" at 110.78,46.242 h1.52
  text "CF-004" at 144.553,46.242 h1.52
  text "1.38mil" at 159.789,46.242 h1.52
  text "Dielectric 1" at 110.78,43.194 h1.52
  text "Core-043" at 144.553,43.194 h1.52
  text "59.00mil" at 159.789,43.194 h1.52
  text "4.3" at 176.295,43.194 h1.52
  text "2" at 100.368,40.146 h1.52
  text "Bottom Layer" at 110.78,40.146 h1.52
  text "CF-004" at 144.553,40.146 h1.52
  text "1.38mil" at 159.789,40.146 h1.52
  text "Bottom Surface Finish" at 110.78,37.098 h1.52
  text "PbSn" at 144.553,37.098 h1.52
  text "0.79mil" at 159.789,37.098 h1.52
  text "Bottom Solder" at 110.78,34.05 h1.52
  text "SM-001" at 144.553,34.05 h1.52
  text "1.00mil" at 159.789,34.05 h1.52
  text "4" at 176.295,34.05 h1.52
  text "Bottom Overlay" at 110.78,31.002 h1.52
  text "Total board thickness:" at 100.368,27.954 h1.52
  text "65.33mil" at 159.789,27.954 h1.52
  text "Symbol" at 99.09,17.89 h1.44
  text "Count" at 109.381,17.89 h1.44
  text "Hole Size" at 121.286,17.89 h1.44
  text "Plated" at 144.387,17.89 h1.44
  text "Hole Type" at 154.677,17.89 h1.44
  text "Drill Layer Pair" at 169.526,17.89 h1.44
  text "Via/Pad" at 199.625,17.89 h1.44
  text "Pad Shape" at 211.595,17.89 h1.44
  text "144" at 109.381,14.89 h1.2
  text "0.300mm (11.81mil)" at 121.286,14.89 h1.2
  text "PTH" at 144.387,14.89 h1.2
  text "Round" at 154.677,14.89 h1.2
  text "Top Layer - Bottom Layer" at 169.526,14.89 h1.2
  text "Via" at 199.625,14.89 h1.2
  text "Rounded" at 211.595,14.89 h1.2
  text "24" at 109.381,11.89 h1.2
  text "0.500mm (19.69mil)" at 121.286,11.89 h1.2
  text "PTH" at 144.387,11.89 h1.2
  text "Round" at 154.677,11.89 h1.2
  text "Top Layer - Bottom Layer" at 169.526,11.89 h1.2
  text "Via" at 199.625,11.89 h1.2
  text "Rounded" at 211.595,11.89 h1.2
  text "4" at 109.381,8.89 h1.2
  text "1.100mm (43.31mil)" at 121.286,8.89 h1.2
  text "PTH" at 144.387,8.89 h1.2
  text "Round" at 154.677,8.89 h1.2
  text "Top Layer - Bottom Layer" at 169.526,8.89 h1.2
  text "Pad" at 199.625,8.89 h1.2
  text "(Mixed)" at 211.595,8.89 h1.2
  text "2" at 109.381,5.89 h1.2
  text "3.200mm (125.98mil)" at 121.286,5.89 h1.2
  text "PTH" at 144.387,5.89 h1.2
  text "Round" at 154.677,5.89 h1.2
  text "Top Layer - Bottom Layer" at 169.526,5.89 h1.2
  text "Pad" at 199.625,5.89 h1.2
  text "Rounded" at 211.595,5.89 h1.2
  text "174 Total" at 109.381,2.89 h1.2